# EAGLE board unhappyhacking (EAGLE 6.4)
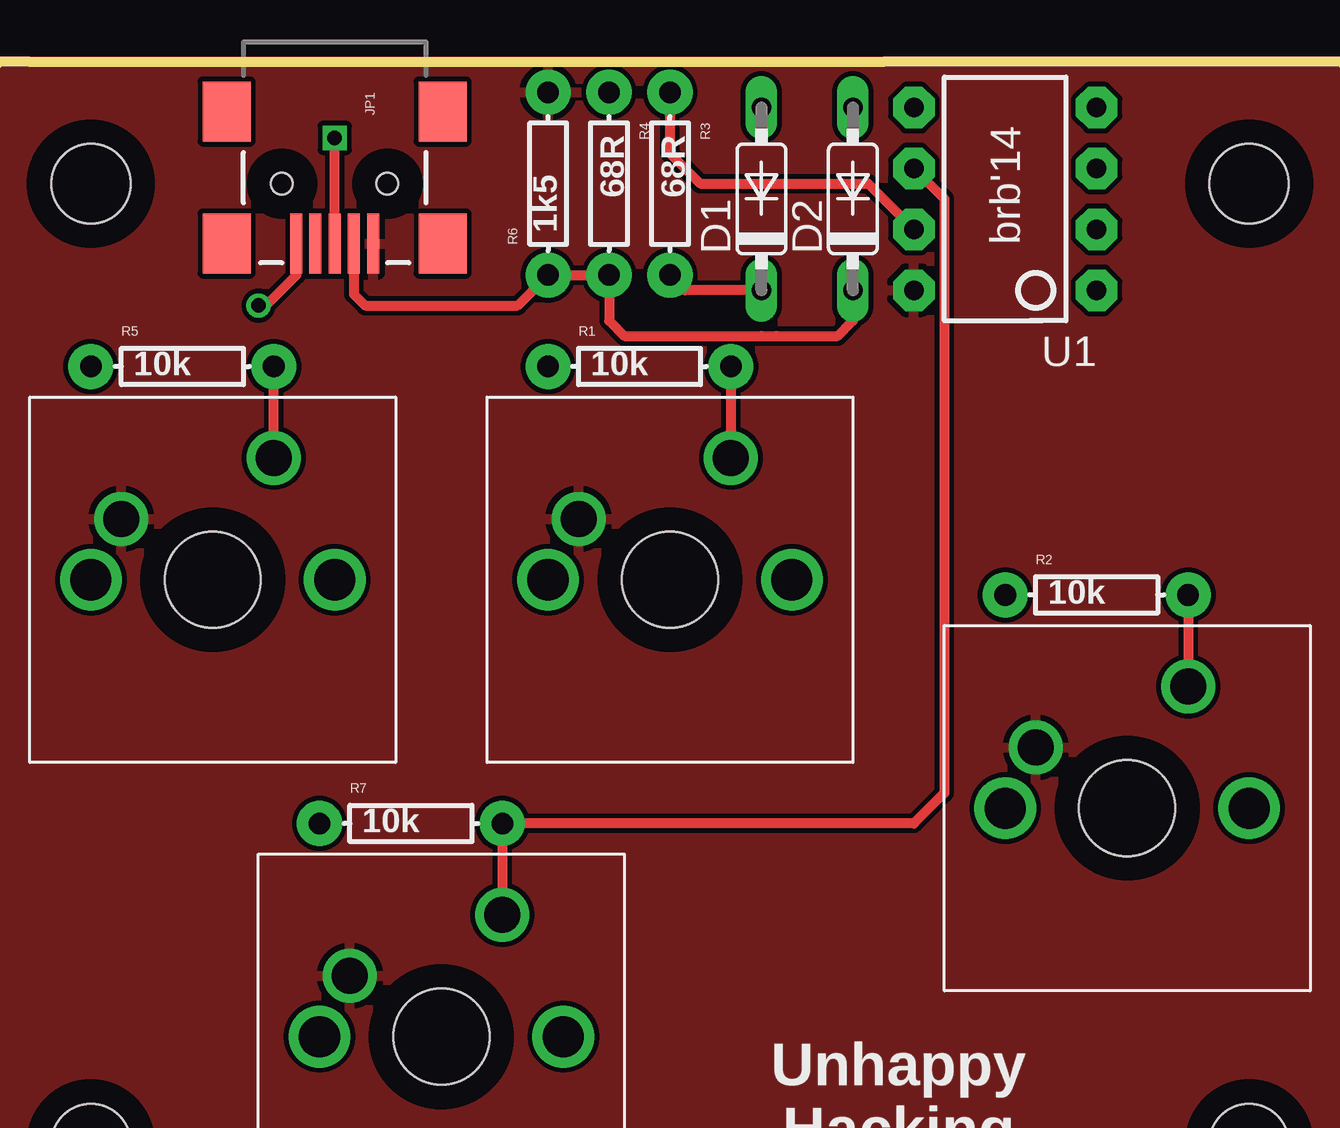
[diagram p0: board, top side]
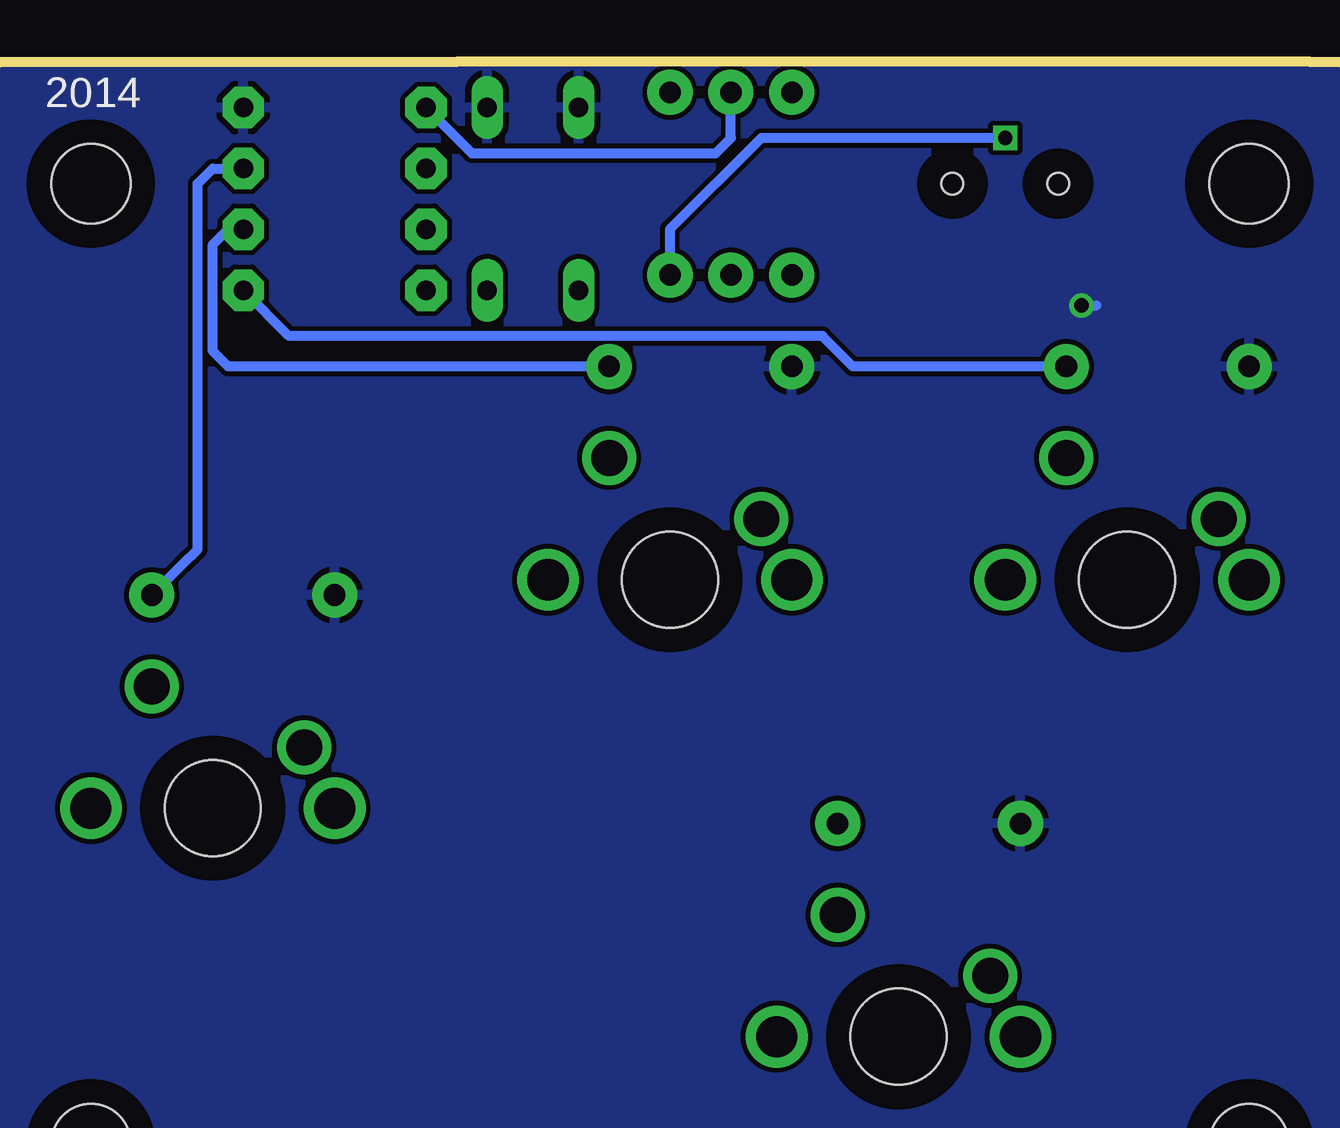
[diagram p1: board, bottom side, seen from below]

No outline drawn. Coordinates in mm, seen from the top.
Copper layers (1*16): Top 0.035mm / dielectric 1.5mm / Bottom 0.035mm
Design rules "default": minimum track width 10mil, minimum drill 24mil, track to track 8mil, track to pad 8mil, pad to pad 8mil, via to via 8mil, smd to smd 8mil, copper to edge 40mil, drill to drill 8mil, minimum pad ring 10mil, minimum via ring 8mil, stop-mask expansion 4mil, vias tented up to drill 0mil, thermal gap 10mil
Milling: 14 lines

## Footprints (pad centres in the part's own frame; a part is rotated, then mirrored left to right if it is on the bottom)
DO35-7 = drill 0.813 long: A 3.81,0; C -3.81,0
USB-MINIB = smd 2.5 x 0.5: D+ 2.5,0; D- 2.5,0.8; GND 2.5,-1.6; ID 2.5,-0.8; VBUS 2.5,1.6 | smd 2.5 x 2: MTN1 -3,4.5; MTN2 2.5,4.5; MTN3 -3,-4.5; MTN4 2.5,-4.5 | hole 0.9: 0,2.2; 0,-2.2
AXIAL-0.3EZ = drill 0.9 pad 1.88: P$1 -3.81,0; P$2 3.81,0
STAND-OFF = hole 3.302: 0,0
DIP08 = drill 0.813 pad 1.727 octagon: 1 -3.81,-3.81; 2 -1.27,-3.81; 3 1.27,-3.81; 4 3.81,-3.81; 5 3.81,3.81; 6 1.27,3.81; 7 -1.27,3.81; 8 -3.81,3.81
CHERRY-MX-I = drill 1.714 pad 1.778: P$3 -5.08,0; P$4 5.08,0 | drill 1.5 pad 2.184: PIN-1 -3.81,2.54; PIN-2 2.54,5.08 | hole 4: 0,0

## Placement (x,y rotation side)
D1  3v6  [DO35-7]  35.56,43.18 90 top
D2  3v6  [DO35-7]  39.37,43.18 90 top
JP1  USBSMD  [USB-MINIB]  17.78,43.81 270 top
R1  10k  [AXIAL-0.3EZ]  30.48,36.2 0 top
R2  10k  [AXIAL-0.3EZ]  49.53,26.67 0 top
R3  68R  [AXIAL-0.3EZ]  31.75,43.81 270 top
R4  68R  [AXIAL-0.3EZ]  29.21,43.81 270 top
R5  10k  [AXIAL-0.3EZ]  11.43,36.2 0 top
R6  1k5  [AXIAL-0.3EZ]  26.67,43.81 90 top
R7  10k  [AXIAL-0.3EZ]  20.95,17.14 0 top
STANDOFF1  STAND-OFF  [STAND-OFF]  7.62,3.81 0 top
STANDOFF2  STAND-OFF  [STAND-OFF]  55.88,3.81 0 top
STANDOFF3  STAND-OFF  [STAND-OFF]  55.88,43.81 0 top
STANDOFF4  STAND-OFF  [STAND-OFF]  7.62,43.81 0 top
U1  TINY85-20-DIP  [DIP08]  45.72,43.18 90 top
U$1  CHERRY-MX-I  [CHERRY-MX-I]  31.75,27.3 0 top
U$2  CHERRY-MX-I  [CHERRY-MX-I]  50.8,17.78 0 top
U$3  CHERRY-MX-I  [CHERRY-MX-I]  12.7,27.3 0 top
U$4  CHERRY-MX-I  [CHERRY-MX-I]  22.23,8.26 0 top

## Library data of the parts
D1 D2 = diode
JP1 = SparkFun-Connectors
R1-R7 = SparkFun-Passives
STANDOFF1-STANDOFF4 = SparkFun-Electromechanical
U1 = SparkFun-DigitalIC; PROD_ID: IC-09445
U$1-U$4 = cherrymx

## Nets
GND: D1.A D2.A JP1.GND R1.P$1 R2.P$1 R5.P$1 R7.P$1 U1.4
MISO: R7.P$2 U1.6 U$4.PIN-2
MOSI: R4.P$1 U1.5
N$2: R2.P$2 U1.3 U$2.PIN-2
N$3: R1.P$2 U1.2 U$1.PIN-2
N$6: D1.C JP1.D+ R3.P$2
N$7: D2.C JP1.D- R4.P$2 R6.P$1
RESET: R5.P$2 U1.1 U$3.PIN-2
SCK: R3.P$1 U1.7
VCC: JP1.VBUS R6.P$2 U1.8 U$1.PIN-1 U$2.PIN-1 U$3.PIN-1 U$4.PIN-1

## Tracks (layer width: path | path; a pad name or v marks a point on that pad's centre or on a via)
GND  (via drill 0.6)
  Top 0.406: JP1.GND 16.18,40.01 14.91,38.73 v14.61,38.73
  Bottom 0.406: v14.61,38.73 13.97,38.73
  pour Bottom: 3.81,48.9 2.54,47.62 2.54,0 3.81,-1.27 59.69,-1.27 60.96,0 60.96,47.62 59.69,48.9
MISO
  Top 0.406: U$4.PIN-2 R7.P$2 41.91,17.14 43.18,18.41 43.18,33.66 43.18,43.18 U1.6
MOSI
  Bottom 0.406: U1.5 40.01,45.09 29.84,45.09 29.21,45.72 R4.P$1
N$2
  Top 0.406: R2.P$2 U$2.PIN-2
  Bottom 0.406: R2.P$2 52.07,27.94 51.44,28.57 51.44,43.81 50.8,44.45 U1.3
N$3
  Top 0.406: R1.P$2 U$1.PIN-2
  Bottom 0.406: R1.P$2 50.16,36.2 50.8,36.83 50.8,41.27 50.16,41.91 U1.2
N$6  (via drill 0.6)
  Top 0.406: D1.C 32.38,39.37 R3.P$2 | JP1.D+ v17.78,45.72
  Bottom 0.406: v17.78,45.72 27.94,45.72 31.75,41.91 R3.P$2
N$7
  Top 0.406: D2.C 39.37,38.1 38.73,37.47 36.2,37.47 35.56,37.47 29.84,37.47 29.21,38.1 R4.P$2 R6.P$1 25.4,38.73 19.05,38.73 18.58,39.2 JP1.D-
RESET
  Top 0.406: U$3.PIN-2 R5.P$2
  Bottom 0.406: R5.P$2 24.13,36.2 25.4,37.47 47.62,37.47 U1.1
SCK
  Top 0.406: R3.P$1 31.75,45.09 32.38,44.45 33.02,43.81 40.01,43.81 U1.7
VCC
  pour Top: 3.81,48.9 2.54,47.62 2.54,0 3.81,-1.27 59.69,-1.27 60.96,0 60.96,47.62 59.69,48.9

## Text on the board
tPlace: Unhappy / Hacking / Keyboard
tNames: brb'14
bNames: 2014